# Altium PCB Топология_печатной_платы_ПУК1111_404.PcbDoc
Units mm, origin at the board's own origin, x right, y up, seen from the top; angles counter-clockwise.
Board outline 55 x 40 mm, 2 copper layers (Top Layer, Bottom Layer); 33 components, 28 nets, 140 pads, 3 vias.
Unrouted connection lines stored in the file: 10.
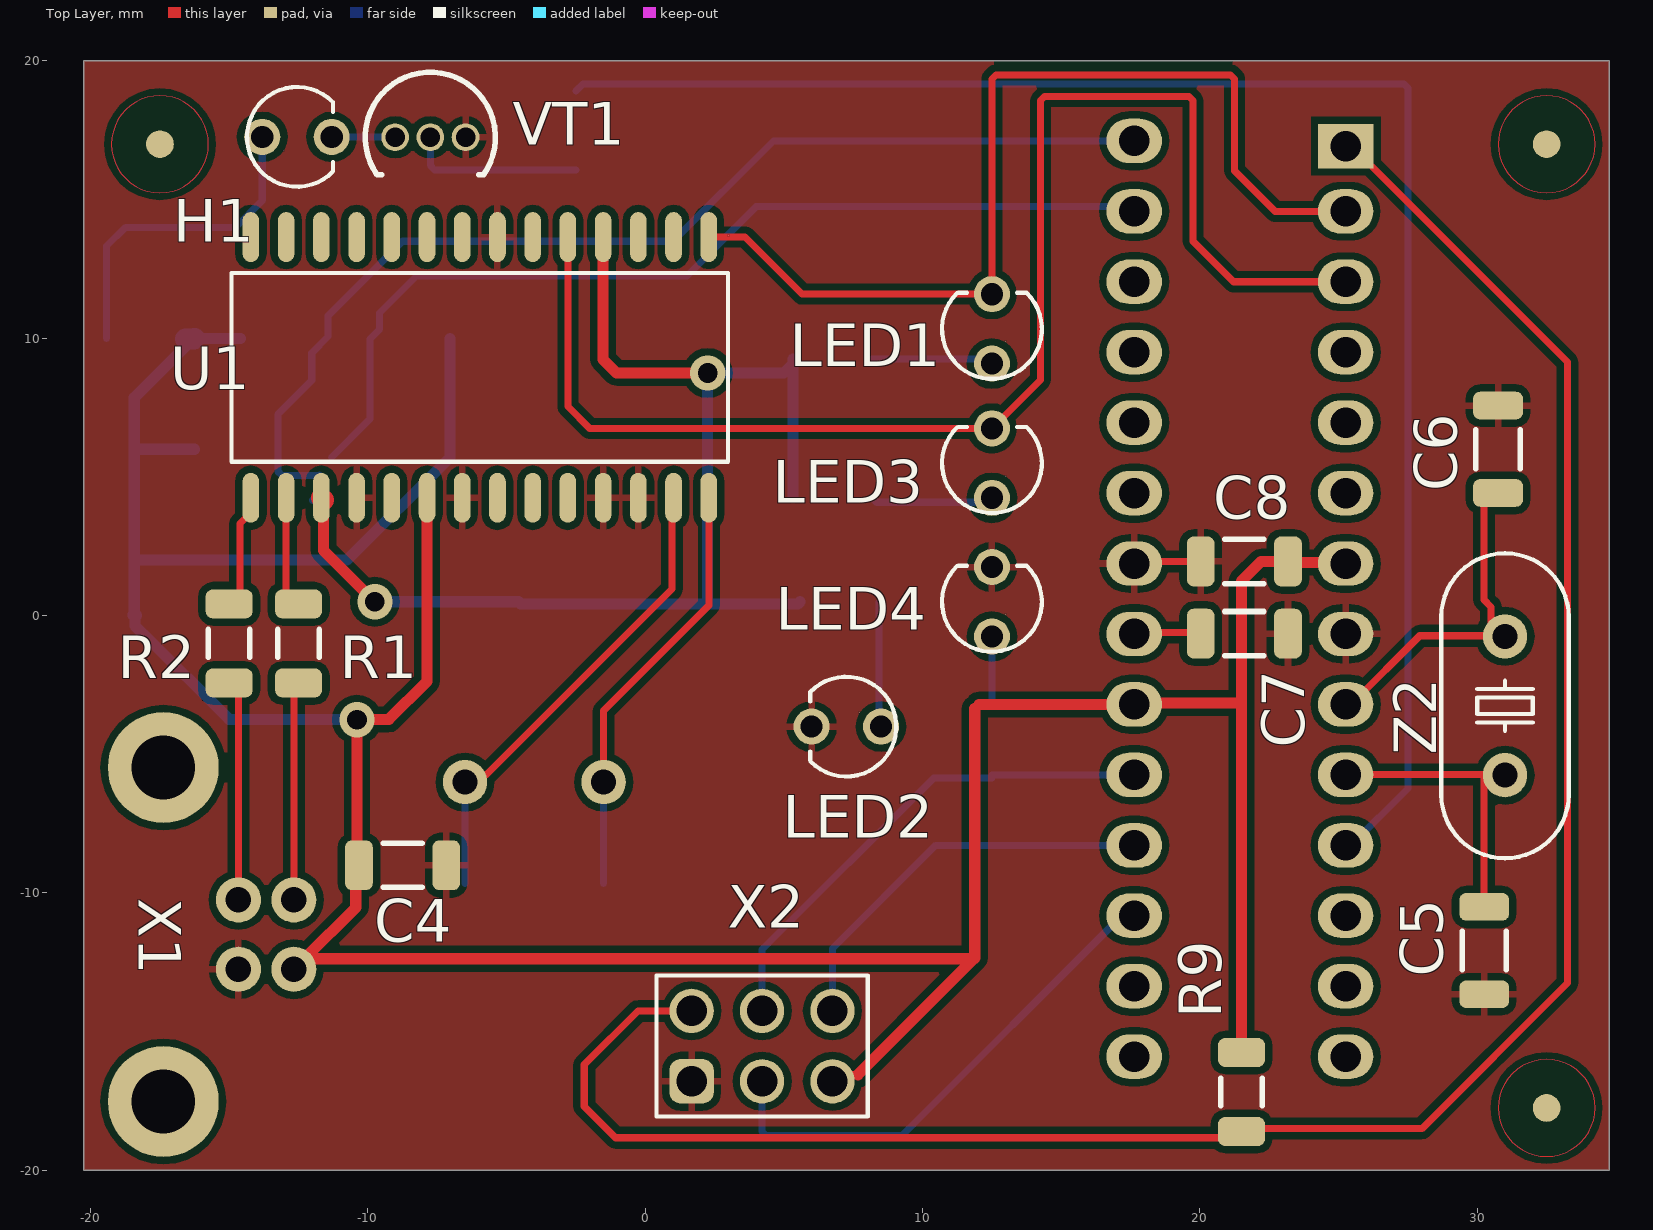
[diagram p0: Top Layer view]
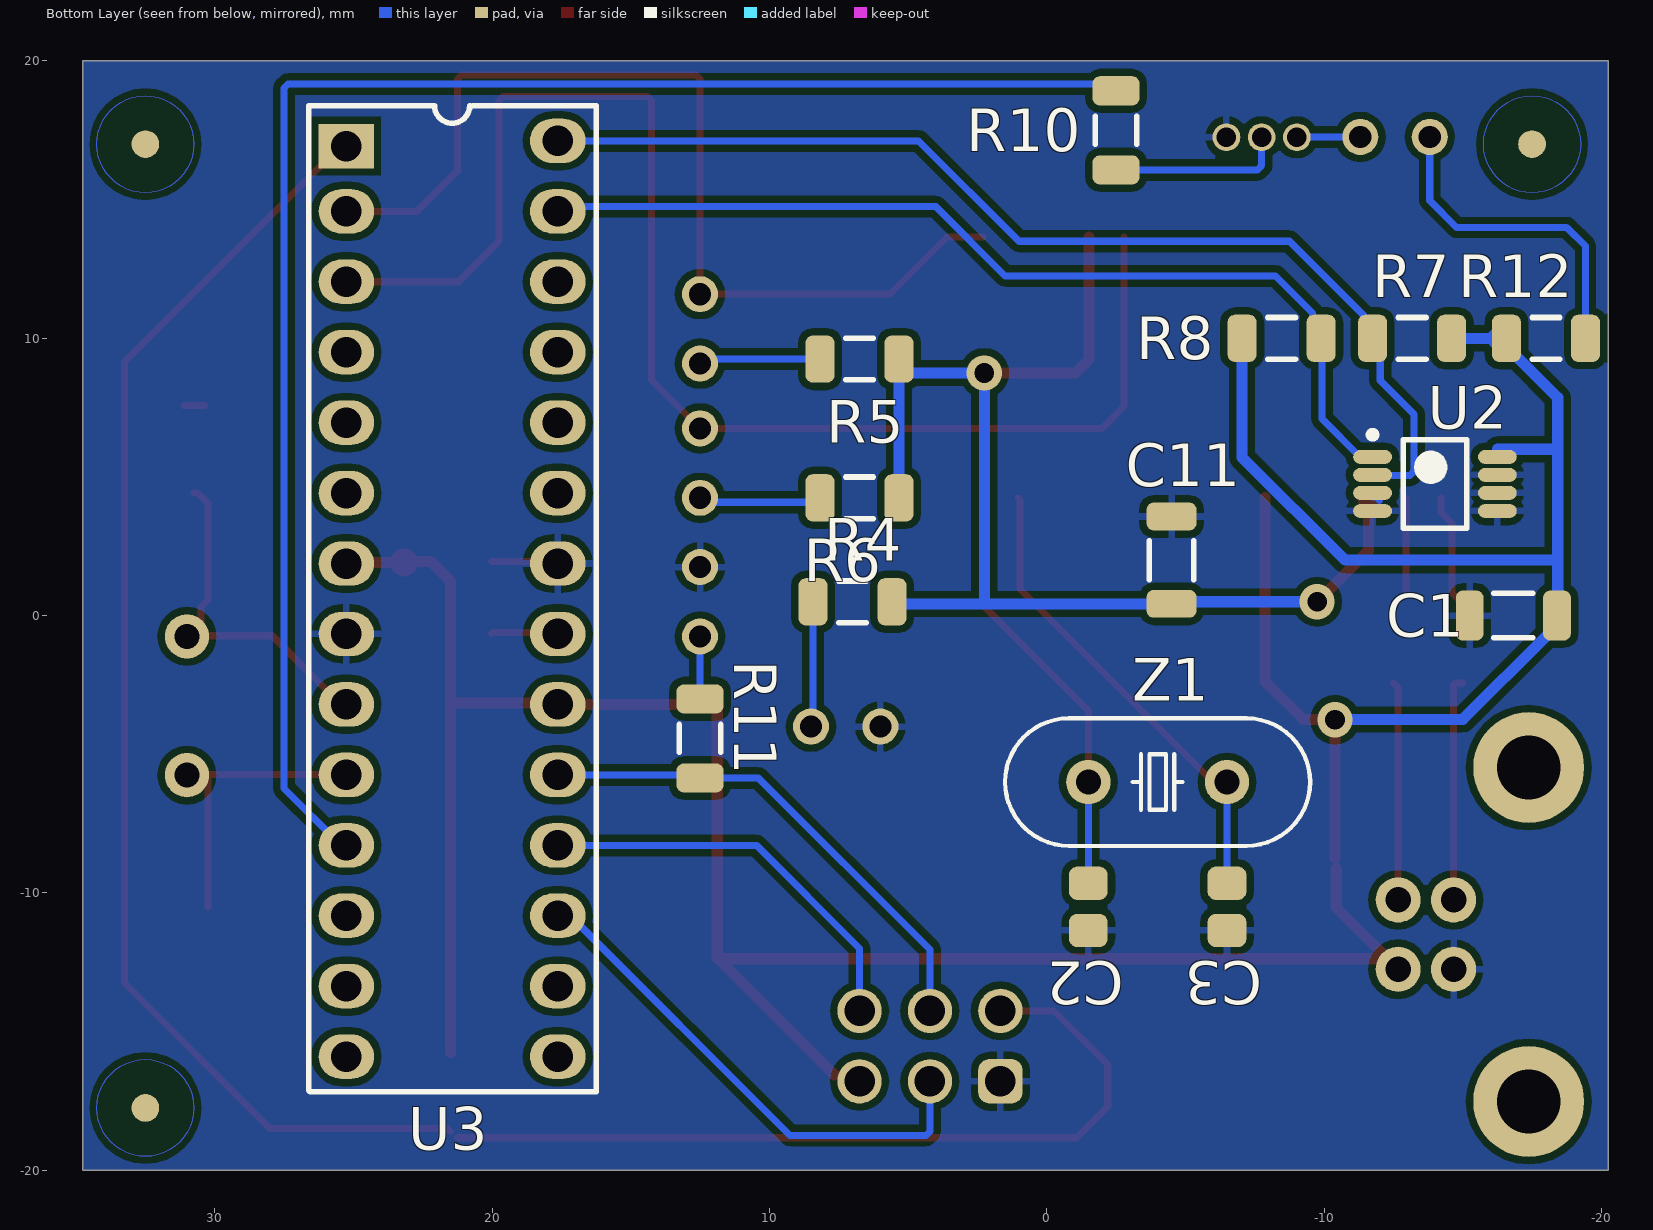
[diagram p1: Bottom Layer view, seen from below]

## Layer stack, top to bottom
Top Solder: solder mask 0.0102, Solder Resist, Dk 3.5
Top Layer: signal copper 0.0356
Dielectric 1: dielectric 0.32, FR-4, Dk 4.8
Bottom Layer: signal copper 0.0356
Bottom Solder: solder mask 0.0102, Solder Resist, Dk 3.5

## Board outline
-20.25,-20 -20.25,20 34.75,20 34.75,-20

## Design rules (kind name [scope] priority, off if disabled: settings)
Clearance [All] p1: gap=0.254 ignorepadtopadclearanceinfootprint=FALSE except(0: Arc-Hole Track-Hole SMDPad-Hole THPad-Hole Via-Hole Fill-Hole Poly-Hole Region-Hole Text-Hole)
PolygonConnect [All] p1: connectstyle=Relief reliefconductorwidth=0.254 reliefentries=4 polygonreliefangle="90 Angle" airgapwidth=0.254
RoomDefinition "Схема принципиальная ПУК-404-19" [InComponentClass('Схема принципиальная ПУК-404-19')] p1: confinementstyle=ConfineIn formatcopy=TRUE lockcomponents=FALSE outline -24.645,49.162 26.155,49.162 26.155,74.562 -24.645,74.562
RoutingVias [All] p1: holewidth=0.711 width=1.27 viastyle="Through Hole" minholewidth=0.711 minwidth=1.27 maxholewidth=0.711 maxwidth=1.27
SilkToSolderMaskClearance [IsText] p1: minsilkscreentomaskgap=0.1 clearancetoexposedcopper=TRUE
SolderMaskExpansion [All] p1: expansion=0.102 istentingtop=FALSE soldermaskfromhole=TRUE
Width [All] p1: maxlimit=1 minlimit=0.25 preferedwidth=0.3 minimp=50.000000 maximp=50.000000 favimp=50.000000
29 further rules are at their usual default settings.

## Components (designator, comment, footprint, x,y, rotation, side; value= is the part's Value field where it differs from the comment)
C1 "0.1 мкФ" C_1206 -16.825,0 r0 bottom
C2 "10пФ" C_0805 -1.5,-10.5 r270 bottom
C3 "10пФ" C_0805 -6.5,-10.5 r270 bottom
C4 "0.1 мкФ" C_1206 -8.75,-9 r180 top
C5 "22пФ" C_1206 30.25,-12.075 r90 top
C6 "22пФ" C_1206 30.75,6 r270 top
C7 "0.1 мкФ" C_1206 21.6,-0.65 r0 top
C8 "0.1 мкФ" C_1206 21.6,1.954 r0 top
C11 "0.1 мкФ" C_1206 -4.5,2 r270 bottom
H1 "TSAL6200" ledrad3mm -12.559,17.263 r0 top
LED1 "LED" ledrad3mm 12.5,10.34 r90 top
LED2 "LED" ledrad3mm 7.25,-4 r180 top
LED3 "LED" ledrad3mm 12.5,5.5 r90 top
LED4 "LED" ledrad3mm 12.5,0.5 r90 top
R1 "27Om" R_1206 -12.5,-1 r270 top
R2 "27Om" R_1206 -15.004,-1 r270 top
R4 "1.5kOm" R_1206 7,0.5 r0 bottom
R5 "1.5kOm" R_1206 6.75,9.25 r0 bottom
R6 "1.5kOm" R_1206 6.75,4.25 r0 bottom
R7 "10kOm" R_1206 -13.175,10 r180 bottom
R8 "10kOm" R_1206 -8.471,10 r0 bottom
R9 "10kOm" R_1206 21.5,-17.175 r270 top
R10 "4.3kOm" R_1206 -2.5,17.5 r270 bottom
R11 "300Om" R_1206 12.5,-4.425 r90 bottom
R12 "33 Om" R_1206 -18,10 r0 bottom
U1 "PL2303HX" SO-28W -5.965,8.95 r270 top
U2 "LM75AD" TSSOP8 -14,4.75 r180 bottom
U3 "atmega328P" 27_DIP_7.62mm 25.26,16.93 r180 bottom
VT1 "BC547" TO-92-CBE -7.75,17.25 r270 top
X1 "USB_Type_B" USB_TypeB_Tyco -17.5,-11.5 r0 top
X2 "X_6" PLD-6 4.21,-15.52 r0 top
Z1 "12МГц" HC-49H -4,-6 r180 bottom
Z2 "16МГц" HC-49H 31,-3.25 r90 top

## Footprints (in the part's own frame and the unit in brackets; to place one, negate y for a bottom-side part, rotate by r counter-clockwise, add the part's x,y. Pads: shape width x height; smd on the part's side, far side on the other; paste and mask are expansions set on the pad)
27_DIP_7.62mm [mm]
  rect 2x1.6 hole 1.1: 1(0,0)
  oval 2x1.6 hole 1.1: 2(0.01,-2.35) 3(0.01,-4.89) 4(0.01,-7.43) 5(0.01,-9.97) 6(0.01,-12.51) 7(0.01,-15.05) 8(0.01,-17.59) 9(0.01,-20.13) 10(0.01,-22.67) 11(0.01,-25.21) 12(0.01,-27.75) 13(0.01,-30.29) 14(0.01,-32.83) 15(7.63,-32.83) 16(7.63,-30.29) 17(7.63,-27.75) 18(7.63,-25.21) 19(7.63,-22.67) 20(7.63,-20.13) 21(7.63,-17.59) 22(7.63,-15.05) 23(7.63,-12.51) 24(7.63,-9.97) 25(7.63,-7.43) 26(7.63,-4.89) 27(7.63,-2.35) 28(7.63,0.19)
  silkscreen extent -1.35,-34.1 9.02,1.46, body extent -0.23,-34.26 7.65,1.68, height 4.65
C_0805 [mm] "Chip Capacitor, 2-Leads, Body 2.00x1.25mm, IPC Medium Density"
  rrect50% 1.2x1.4 smd: 1(-0.85,0) 2(0.85,0)
  body extent -1.1,-0.72 1.1,0.72, height 1.45
C_1206 [mm] "Chip Capacitor, 2-Leads, Body 3.20x1.60mm, IPC Medium Density"
  rrect50% 1x1.8 smd: 1(-1.575,0) 2(1.575,0)
  silkscreen extent -0.7,-0.8 0.7,0.8, body extent -1.75,-0.9 1.75,0.9, height 1.8
HC-49H [mm]
  round 1.6 hole 0.9: 1(2.5,0) 2(-2.5,0)
  silkscreen extent -5.5,-2.3 5.5,2.3, body extent -5.4,-2.25 5.4,2.25, height 3.5
ledrad3mm [mm]
  round 1.3 hole 0.8: 1(-1.252,0) 2(1.252,0)
  silkscreen extent -1.8,-1.8 1.3,1.8, body extent -2.01,-2 1.5,2, height 15.5
PLD-6 [mm]
  round 1.6 hole 1.1: 2(-2.54,1.27) 3(0,-1.27) 4(0,1.27) 5(2.54,-1.27) 6(2.54,1.27)
  rrect50% 1.6x1.6 hole 1.1: 3(-2.54,-1.27)
  silkscreen extent -3.81,-2.54 3.81,2.54, body extent -3.81,-2.54 3.81,2.54, height 8.5
R_1206 [mm] "Chip Resistor, 2-Leads, Body 3.10x1.60mm, IPC Medium Density"
  rrect50% 1.05x1.7 smd: 1(-1.425,0) 2(1.425,0)
  silkscreen extent -0.5,-0.75 0.5,0.75, body extent -1.6,-0.85 1.6,0.85, height 0.65
SO-28W [mm] "JEDEC MS-013"
  oval 1.8x0.6 smd: 1(-4.7,8.255) 2(-4.7,6.985) 3(-4.7,5.715) 4(-4.7,4.445) 5(-4.7,3.175) 6(-4.7,1.905) 7(-4.7,0.635) 8(-4.7,-0.635) 9(-4.7,-1.905) 10(-4.7,-3.175) 11(-4.7,-4.445) 12(-4.7,-5.715) 13(-4.7,-6.985) 14(-4.7,-8.255) 15(4.7,-8.255) 16(4.7,-6.985) 17(4.7,-5.715) 18(4.7,-4.445) 19(4.7,-3.175) 20(4.7,-1.905) 21(4.7,-0.635) 22(4.7,0.635) 23(4.7,1.905) 24(4.7,3.175) 25(4.7,4.445) 26(4.7,5.715) 27(4.7,6.985) 28(4.7,8.255)
  silkscreen extent -3.4,-8.95 3.4,8.95, body extent -3.8,-8.95 3.8,8.95, height 2.57
TO-92-CBE [mm] "TO, Flat Index; 3 In-Line, Axial Leads; Body Dia. 4.6mm; Leads 0.41 x 0.39 mm (max)"
  round 1 hole 0.7: 1(0,0) 2(0,1.27) 3(0,-1.27)
  silkscreen extent -2.34,-2.34 1.35,2.34, body extent -2.5,-2.5 1.5,2.5, height 7
TSSOP8 [mm] "TSOP, 8-Leads, Body 3.00x2.95mm, Pitch 0.65mm, IPC Medium Density"
  oval 1.4x0.5 smd: 1(-2.25,0.975) 2(-2.25,0.325) 3(-2.25,-0.325) 4(-2.25,-0.975) 5(2.25,-0.975) 6(2.25,-0.325) 7(2.25,0.325) 8(2.25,0.975)
  silkscreen extent -2.38,-1.6 1.15,1.9, body extent -2.45,-1.6 2.45,1.6, height 1.1
USB_TypeB_Tyco [mm]
  round 1.626 hole 0.914: 1(4.83,-1.25) 2(4.83,1.25) 3(2.83,1.25) 4(2.83,-1.25)
  round 4 hole 2.3: MH(0.12,-6.02) MH(0.12,6.02)
  body extent -10.16,-7.47 6.14,7.43, height 11.6

## Part data
C1 C2 C3 C4 C5 C6 C7 C8 C11: library part C, ComponentLink1Description=link
  C1 C4 C7 C8 C11: ComponentLink1URL=https://www.chipdip.ru/product0/9000697437
  C2 C3: ComponentLink1URL=https://www.chipdip.ru/product0/27587
  C5 C6: ComponentLink1URL=https://www.chipdip.ru/product0/560852172
H1: library part LED, ComponentLink1Description=link, ComponentLink1URL=https://www.chipdip.ru/product/tsal6200?from=suggest_product
R1 R2 R4 R5 R6 R7 R8 R9 R10 R11 R12: library part Resistor, ComponentLink1Description=link
  R1 R2: ComponentLink1URL=https://www.chipdip.ru/product/0.25w-1206-27-om-1
  R4 R5 R6: ComponentLink1URL=https://www.chipdip.ru/product/0.25w-1206-1.5-kom-1
  R7 R8 R9: ComponentLink1URL=https://www.chipdip.ru/product/0.25w-1206-10-kom-1
  R10: ComponentLink1URL=https://www.chipdip.ru/product/0.25w-1206-4.3-kom-1
  R11: ComponentLink1URL=https://www.chipdip.ru/product/0.25w-1206-300-om-1
  R12: ComponentLink1URL=https://www.chipdip.ru/product/0.25w-1206-33-om-1
VT1: library part NPN_BEC, ComponentLink1Description=link, ComponentLink1URL=https://www.chipdip.ru/product0/8007169940
X1: library part X_4, ComponentLink1Description=link, ComponentLink1URL=https://www.chipdip.ru/product/usbb-1j
Z1 Z2: library part "Кварцевый резонатор", ComponentLink1Description=link
  Z1: ComponentLink1URL=https://www.chipdip.ru/product/12mhz-hc-49s
  Z2: ComponentLink1URL=https://www.chipdip.ru/product/16mhz-hc-49s
LED1: ComponentLink1Description=link, ComponentLink1URL=https://www.chipdip.ru/product/gnl-3012gd-green
LED2: ComponentLink1Description=link, ComponentLink1URL=https://www.chipdip.ru/product/gnl-3012yd
LED3 LED4: ComponentLink1Description=link, ComponentLink1URL=https://www.chipdip.ru/product/gnl-3012ed
U1: ComponentLink1Description=link, ComponentLink1URL=https://market.yandex.ru/product--mikroskhema-pl2303hx/101671693841?text=pl2303%20%D0%BA%D1%83%D0%BF%D0%B8%D1%82%D1%8C&cpc=bNKuNdDTZsqVRNy2uKVv1msD_OtO4zXlbxS3fj54qsreC0dGgIJAi4LfFARQF2DgdkCkHKwVvOfzqoQEYqosxJEXxp3WeedEOXoYck00HBR2kZwJYLRH-UzkT0PLe5991N8MS10oqEhLd1ZiK6d1Ruqlij-cSaPQ7uADsWt2oNhLhCuggyBAXmVDBIzF7xIC-kwi6xp3bTE%2C&sku=101671693841&do-waremd5=ySBio8NQJaHlgnQ9xQDWig&cpa=1&nid=61856
U2: ComponentLink1Description=link, ComponentLink1URL=https://www.chipdip.ru/product/lm75ad.118?from=suggest_product
U3: ComponentLink1Description=link, ComponentLink1URL=https://www.ozon.ru/product/atmega-328p-pu-dip-28-562350561/?asb=I9xK3DYnsq%252F6IhyX3W8scHwjgmDiM8Kzbmwyx3X6VIk%253D&asb2=VfizZ9RKUUordInhR9mkRyCkW2b-XBna7EclAgALVhcc5Z76v75_VL0e9uKFy7yB&avtc=1&avte=2&avts=1680886458&keywords=atmega+328p&sh=zeQ5esD1SA
X2: ComponentLink1Description=link, ComponentLink1URL=https://www.chipdip.ru/product/pld-6

## Free pads (board coordinates)
  round 1 smd mask+1: 2(-17.5,17) 2(32.5,-17.75) 2(32.5,17)
  round 1 smd paste-1 mask+1: 2(32.5,-17.75)
  round 1 all layers, no hole mask+1: 3(-17.5,17) 3(32.5,-17.75) 3(32.5,17)

## Via types
v1: diameter 1.27, hole 0.711, Top Layer to Bottom Layer, 3 vias

## Nets (pads, with @x,y where several pads share a name; then routed paths per layer and width w, separated by ;. In a path a pad name is that pad's centre, name@x,y a point inside that pad or via, vN(x,y) a via of type N, cw(c..) or ccw(c..) an arc to the next point about the centre after c; other vN are vias at no path point)
3.3V: C11.2 R4.1 R5.1 R6.1 U1.4 U1.17 | length 45.1
  Top Layer w0.4: U1.17@-11.605,4.175 -11.642,4.138 -11.642,3.558 -11.605,3.521 -11.605,2.355 v1(-9.75,0.5) ; U1.4 -1.52,9.234 -1.036,8.75 v1(2.25,8.75)
  Top Layer w0.75: U1.17 U1.17@-11.605,4.175
  Bottom Layer w0.4: v1(-9.75,0.5) -4.575,0.5 C11.2 2.25,0.425 ; R6.1 R5.1 5.325,9.07 5.005,8.75 v1(2.25,8.75) 2.25,4.512 2.25,0.425 ; R4.1 5.5,0.425 2.25,0.425
GND: C1.2 C2.2 C3.2 C4.1 C5.1 C6.1 C7.2 C8.1 C11.1 LED2.2 LED4.2 U1.7 U1.18 U1.21 U1.25 U1.26 U2.4 U2.5 U2.6 U2.7 U3.8 U3.22 VT1.2 X1.4 X2.3@1.67,-16.79 | length 3.6
  Top Layer w0.254: U3.22@17.724,1.954 C8.1 ; U3.8 U3.8@25.45,-0.66 ; U3.8@25.25,-0.65 U3.8@25.28,-0.65 ; C6.1@30.35,7.575 C6.1 C6.1@31.1,7.575
  Bottom Layer w0.254: -12,4.161 -11.886,4.275 -11.75,4.275
NetC2_1: C2.1 U1.28 Z1.2 | length 15.5
  Top Layer w0.254: Z1.2 -1.5,-3.428 2.29,0.362 U1.28
  Bottom Layer w0.254: C2.1 Z1.2
NetC3_1: C3.1 U1.27 Z1.1 | length 17.3
  Top Layer w0.254: Z1.1 -6.242,-5.742 -5.742,-5.742 0.963,0.963 0.963,4.193 U1.27
  Bottom Layer w0.254: C3.1 Z1.1
NetC5_2: C5.2 U3.10 Z2.2 | length 10.2
  Top Layer w0.254: U3.10 U3.10@25.45,-5.74 ; U3.10@25.45,-5.733 Z2.2@30.25,-5.733 ; C5.2 Z2.2@30.25,-5.75 ; Z2.2@30.5,-5.75 Z2.2
NetC6_2: C6.2 U3.9 Z2.1 | length 12.2
  Top Layer w0.254: U3.9 25.45,-3.2 27.925,-0.725 30.725,-0.725 30.75,-0.75 30.492,-0.492 30.492,0.316 30.25,0.558 30.25,4.061 30.614,4.425 C6.2
NetC7_1: C7.1 U3.21 | length 2.3
  Top Layer w0.254: U3.21@17.7,-0.61 19.985,-0.61 C7.1
NetH1_1: H1.1 R12.1 | length 11.9
  Bottom Layer w0.254: R12.1 -19.425,13.325 -18.75,14 -14.776,14 -13.811,14.965 H1.1
NetH1_2: H1.2 VT1.3 | length 2.3
  Bottom Layer w0.254: H1.2 -9.032,17.263 VT1.3
NetLED1_1: LED1.1 R5.2 | length 4.4
  Bottom Layer w0.254: R5.2 12.338,9.25 LED1.1
NetLED1_2: LED1.2 U1.1 U3.3 | length 35.6
  Top Layer w0.254: U1.1 3.598,13.65 5.656,11.592 LED1.2 12.5,19.351 12.649,19.5 21.101,19.5 21.25,19.351 21.25,16.04 22.71,14.58 25.25,14.58
NetLED2_1: LED2.1 R4.2 | length 4.5
  Bottom Layer w0.254: R4.2 8.425,-3.923 LED2.1
NetLED3_1: LED3.1 R6.2 | length 4.5
  Bottom Layer w0.254: R6.2 8.337,4.088 12.34,4.088 LED3.1
NetLED3_2: LED3.2 U1.5 U3.2 | length 51.1
  Top Layer w0.254: U1.5 -2.79,7.54 -2.002,6.752 LED3.2 14.25,8.502 14.25,18.569 14.399,18.718 19.601,18.718 19.75,18.569 19.75,13.5 21.21,12.04 25.25,12.04
NetLED4_1: LED4.1 R11.2 | length 2.2
  Bottom Layer w0.254: R11.2 LED4.1
NetR1_1: R1.1 U1.16 | length 4
  Top Layer w0.254: U1.16 -12.95,0.813 -12.562,0.425 R1.1
NetR1_2: R1.2 X1.2 | length 7.9
  Top Layer w0.254: X1.2 -12.67,-2.595 R1.2
NetR2_1: R2.1 U1.15 | length 4.2
  Top Layer w0.254: R2.1 -14.995,0.425 -14.608,0.813 -14.608,3.328 -14.22,3.716 U1.15
NetR2_2: R2.2 X1.3 | length 8.1
  Top Layer w0.254: R2.2 -14.75,-2.425 -14.67,-2.505 X1.3
NetR7_1: R7.1 U2.2 U3.28 | length 39.6
  Bottom Layer w0.254: U2.2 -11.769,5.056 -13.101,5.056 -13.25,5.205 -13.25,7.25 -12.026,8.474 -12.026,9.472 -11.436,10.063 -11.436,10.814 -8.75,13.5 1,13.5 4.62,17.12 U3.28
NetR8_1: R8.1 U2.1 U3.27 | length 34.8
  Bottom Layer w0.254: U2.1@-11.319,5.706 -9.925,7.1 -9.925,9.971 -9.581,10.314 -9.581,10.919 -8.25,12.25 1.5,12.25 4,14.75 17.46,14.75 U3.27
NetR9_2: R9.2 U3.1 X2.2 | length 77.7
  Top Layer w0.254: X2.2 -0.26,-14.25 -2.2,-16.19 -2.2,-17.7 -1.075,-18.825 R9.2@21.25,-18.825 ; R9.2 21.6,-18.5 28,-18.5 33.25,-13.25 33.25,9.14 25.46,16.93 U3.1
NetR10_1: R10.1 U3.11 | length 58.5
  Bottom Layer w0.254: R10.1 -2.25,19.175 27.351,19.175 27.5,19.026 27.5,-6.23 25.45,-8.28 U3.11
NetR10_2: R10.2 VT1.1 | length 6.3
  Bottom Layer w0.254: VT1.1 -7.75,16.224 -7.601,16.075 R10.2
NetR11_1: R11.1 U3.19 X2.4 | length 18.2
  Bottom Layer w0.254: X2.4 4.21,-12.04 10.4,-5.85 R11.1 ; R11.1@12.5,-5.74 U3.19
NetU3_17: U3.17 X2.3@4.21,-16.79 | length 18.6
  Bottom Layer w0.254: X2.3@4.21,-16.79 4.21,-18.601 4.359,-18.75 9.25,-18.75 17.18,-10.82 U3.17
NetU3_18: U3.18 X2.6 | length 14.7
  Bottom Layer w0.254: X2.6 6.75,-12 10.47,-8.28 U3.18
VCC: C1.1 C4.2 C8.2 R7.2 R8.2 R9.1 R12.2 U1.20 U2.8 U3.7 U3.20 X1.1 X2.5 | length 132.5
  Top Layer w0.254: X2.5 6.75,-16.969 6.853,-17.072 7.372,-16.553 7.676,-16.553 ; 11.859,-12.37 11.879,-12.35 ; 11.879,-3.349 12.028,-3.2 ; U3.20 U3.20@17.68,-3.15
  Top Layer w0.4: X1.1 X1.1@-12.29,-12.37 ; C4.2@-10.439,-9.114 -10.439,-10.519 X1.1@-12.29,-12.37 ; C4.2@-10.397,-8.75 v1(-10.397,-3.75) -9.25,-3.75 -7.87,-2.37 U1.20 ; 7.676,-16.553 11.879,-12.35 11.879,-3.349 ; 11.859,-12.37 X1.1@-12.29,-12.37 ; 12.028,-3.2 U3.20 ; U3.20@17.68,-3.15 21.5,-3.15 ; R9.1 21.5,-3.15 ; C8.2@23.175,1.917 U3.7@25.307,1.917 ; C8.2 22.204,1.954 21.5,1.25 21.5,-3.15
  Top Layer w1: C8.2@23.175,1.917 C8.2@23.175,1.93 ; U3.7@25.307,1.917 U3.7@25.32,1.93
  Bottom Layer w0.4: C1.1@-18.425,0.025 -18.425,2 ; C1.1 -18.4,-0.373 -18.073,-0.7 -18.05,-0.7 -15,-3.75 v1@-10.41,-3.75 ; R12.2 -16.575,9.975 -16.575,9.709 -18.425,7.859 -18.425,6 ; -16.255,6 -18.425,6 ; R12.2@-16.25,10 R7.2 ; R8.2 -7.046,5.704 -10.75,2 -18.425,2 ; -18.425,2 -18.425,6
  Bottom Layer w0.5: C1.1@-18.425,0.025 C1.1
  Bottom Layer w0.75: R12.2@-16.575,9.975 -16.275,9.975 R12.2@-16.25,10
pads on no net: U1.2 U1.3 U1.6 U1.8 U1.9 U1.10 U1.11 U1.12 U1.13 U1.14 U1.19 U1.22 U1.23 U1.24 U2.3 U3.4 U3.5 U3.6 U3.12 U3.13 U3.14 U3.15 U3.16 U3.23 U3.24 U3.25 U3.26 X1.MH

## Polygon pours and split planes (outlines as drawn)
GND on Bottom Layer "GND_L02_P008" (solid, remove dead copper, pour order 8): -20.25,-20 -20.25,20 34.75,20 34.75,-20
GND on Top Layer "GND_L01_P009" (solid, remove dead copper, pour order 9): -20.25,-20 -20.25,20 34.75,20 34.75,-20

## Other copper
Multi-Layer:
  circle w0: c-17.5,17 r1.75
  circle w0: c32.5,17 r1.75
  circle w0 net GND: c32.5,-17.75 r1.75

## Silkscreen, mask and mechanical layers (free items; w line width, h text height)
Mechanical 15:
  lines w0.254: -20.758,-18.476 -20.25,-20 ; -20.758,18.476 -20.25,20 ; -20.504,-20 -19.996,-20 ; -20.504,20 -19.996,20 ; -20.25,-5.104 -20.25,-20 ; -20.25,5.104 -20.25,20 ; -20.25,19.746 -20.25,20.254 ; -19.742,-18.476 -20.25,-20 ; -19.742,18.476 -20.25,20 ; -18.726,19.492 -20.25,20 ; -18.726,20.508 -20.25,20 ; 2.146,20 -20.25,20 ; 12.354,20 34.75,20 ; 33.226,19.492 34.75,20 ; 33.226,20.508 34.75,20 ; 34.75,19.746 34.75,20.254
  text "55 (mm)" at 2.4,19.086 h1.52
  text "40 (mm)" at -19.336,-4.85 h1.52 r90